# Altium PCB BU01.PcbDoc
Units mm, origin at the board's own origin, x right, y up, seen from the top; angles counter-clockwise.
Board outline 35.56 x 22.86 mm, 2 copper layers (Top Layer, Bottom Layer); 7 components, 21 nets, 48 pads, 3 vias.
Unrouted connection lines stored in the file: 6.
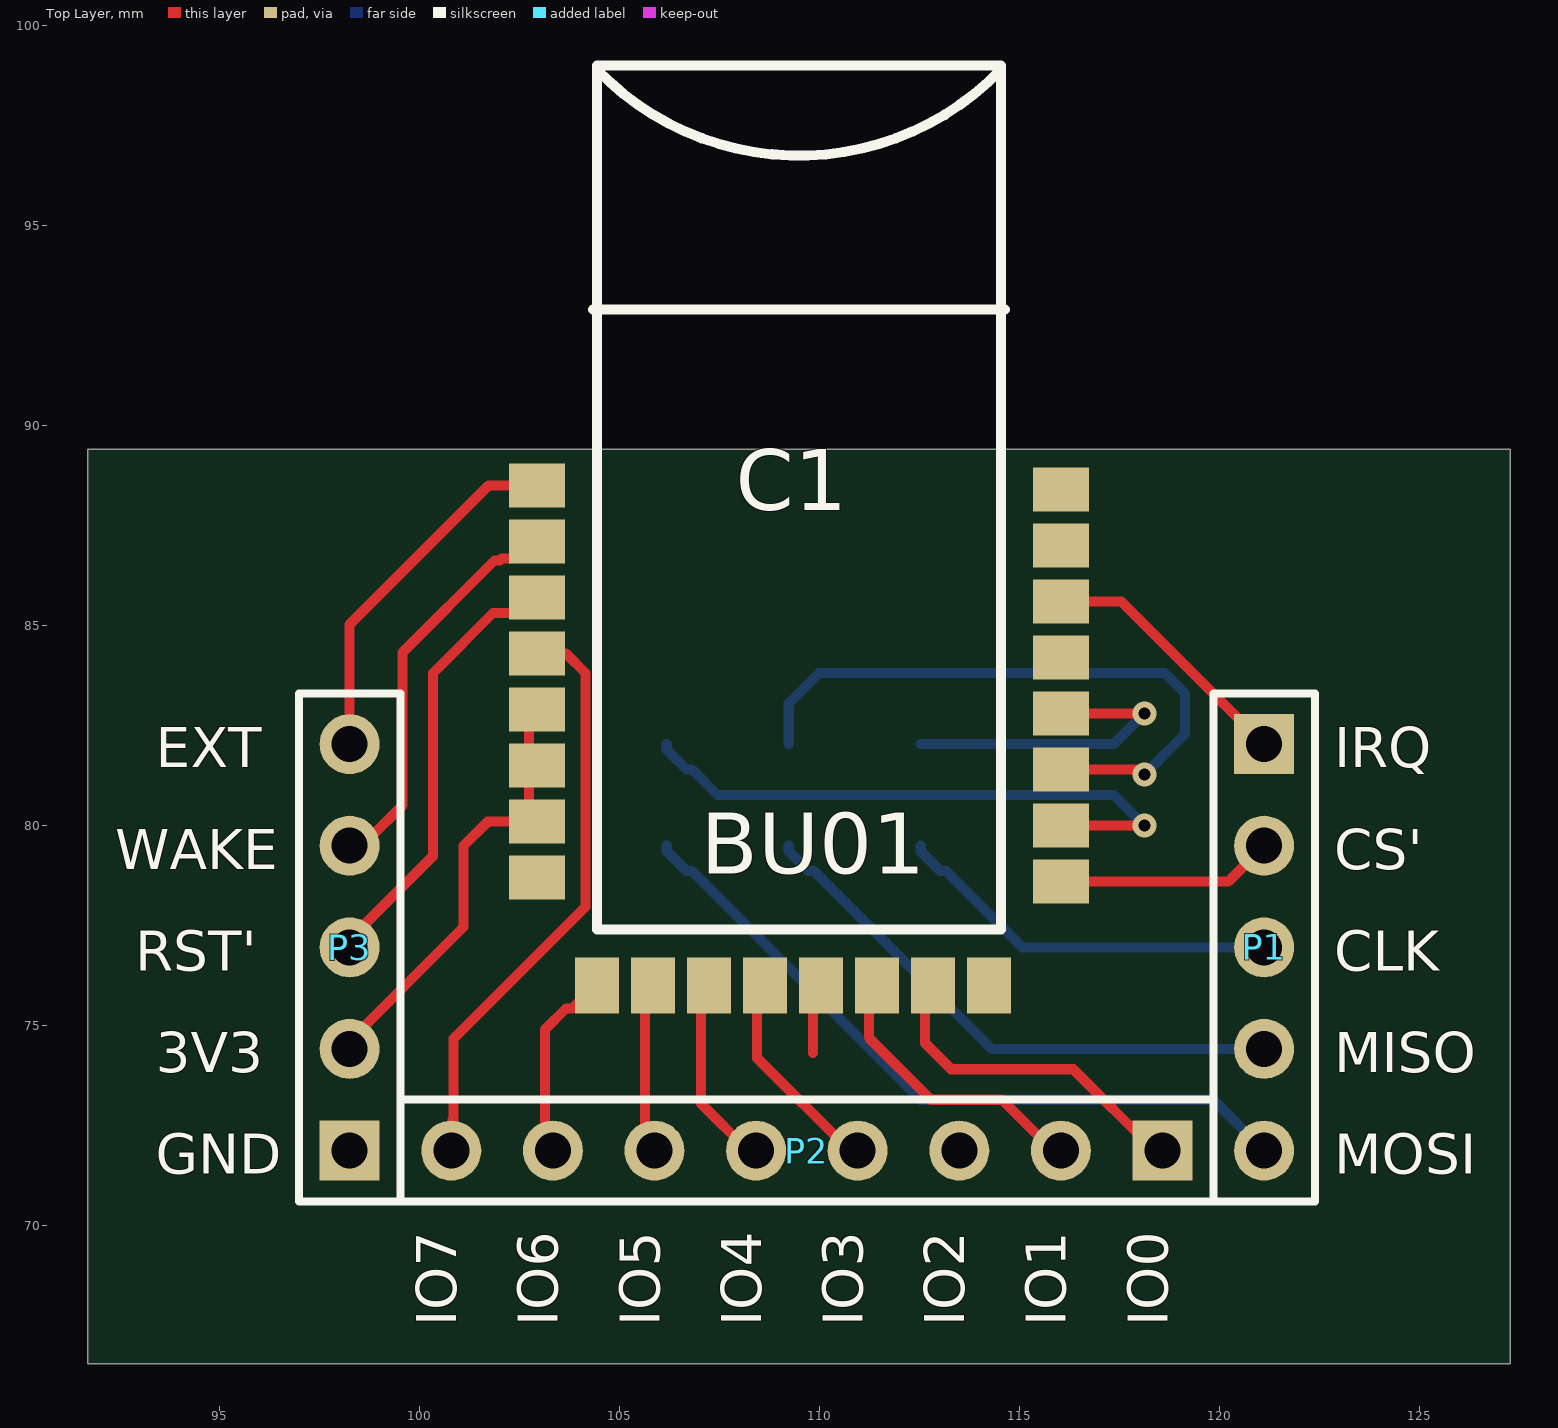
[diagram p0: Top Layer view]
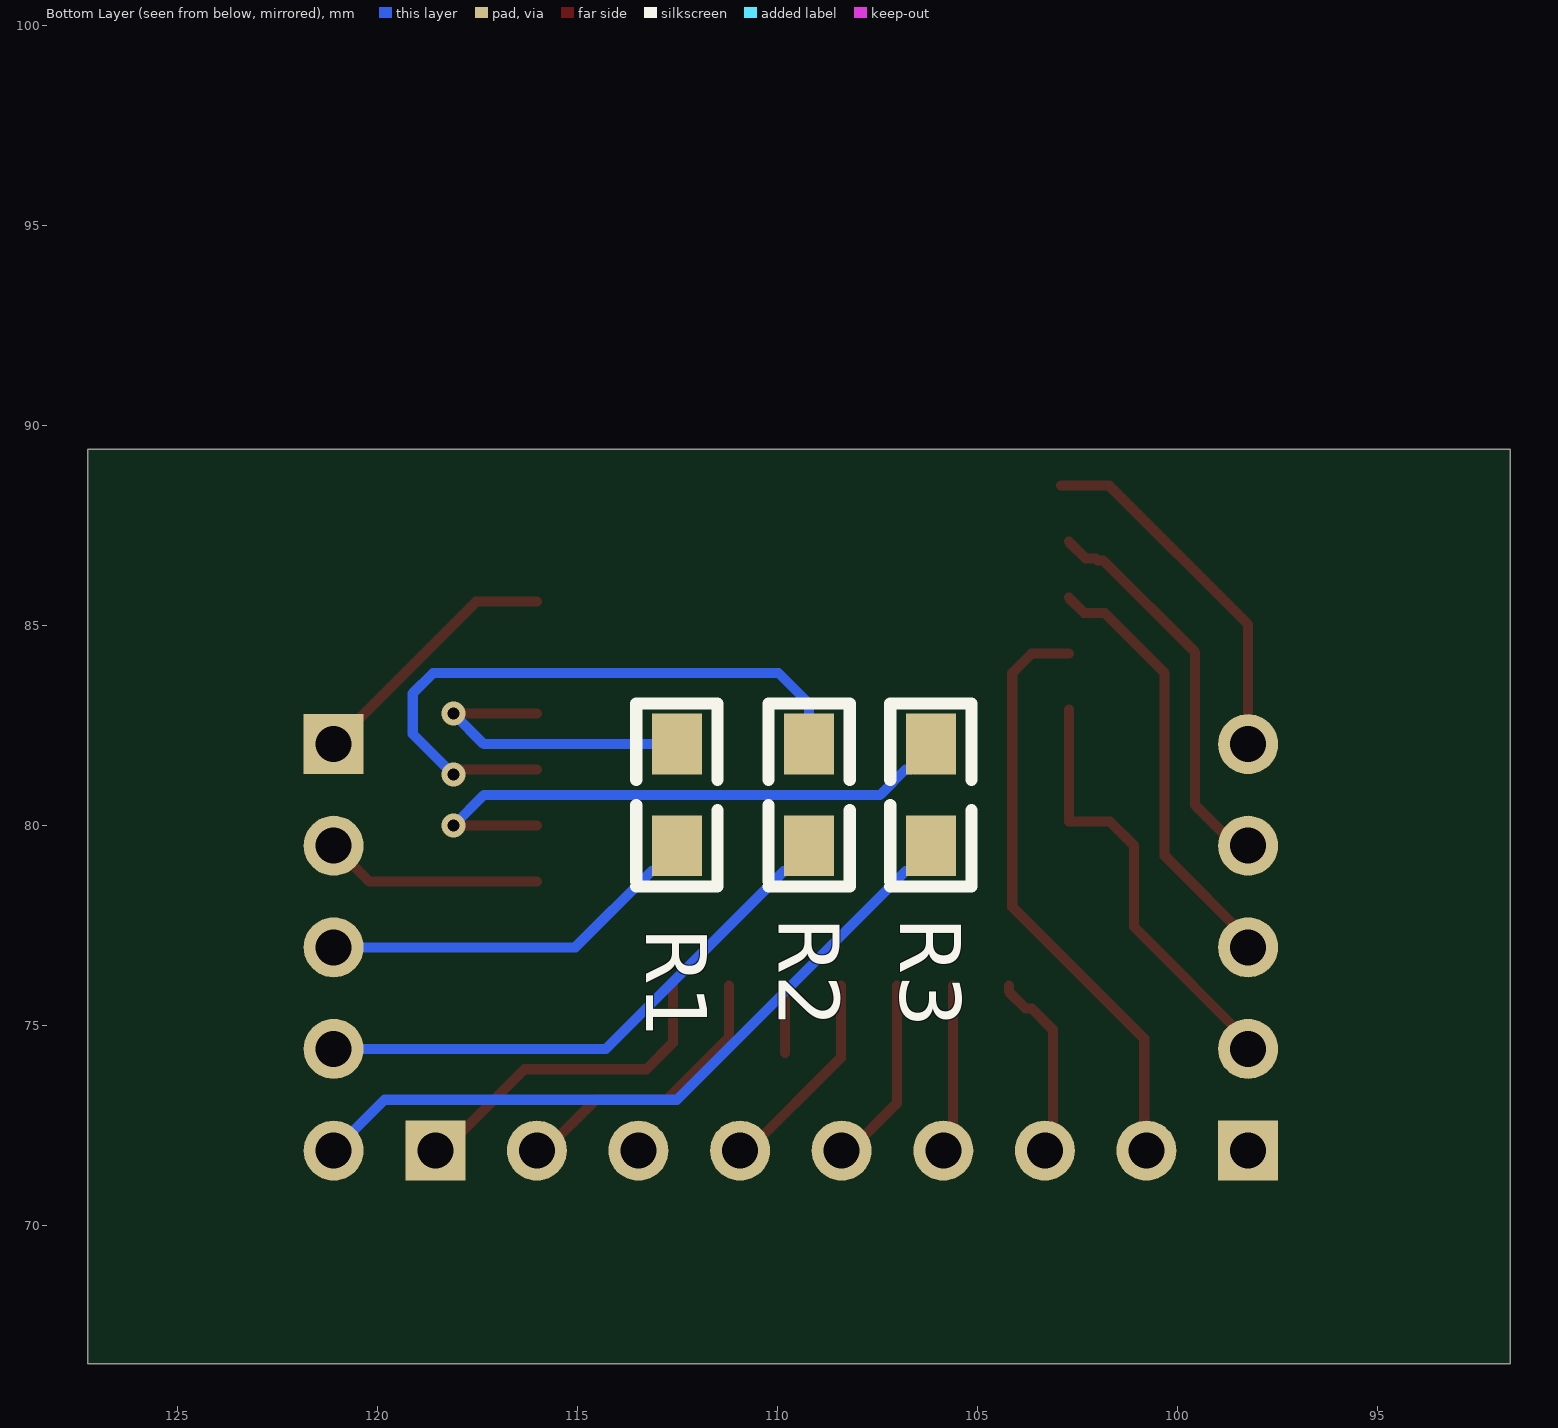
[diagram p1: Bottom Layer view, seen from below]

## Layer stack, top to bottom
Top Solder: solder mask 0.0102, Solder Resist, Dk 3.5
Top Layer: signal copper 0.0356
Dielectric 1: dielectric 0.32, FR-4, Dk 4.8
Bottom Layer: signal copper 0.0356
Bottom Solder: solder mask 0.0102, Solder Resist, Dk 3.5

## Board outline
91.694,89.408 127.254,89.408 127.254,66.548 91.694,66.548

## Design rules (kind name [scope] priority, off if disabled: settings)
Clearance [All] p1: gap=0.152 ignorepadtopadclearanceinfootprint=FALSE except(0: Arc-Hole Track-Hole SMDPad-Hole THPad-Hole Via-Hole Fill-Hole Poly-Hole Region-Hole Text-Hole)
ComponentClearance [All] p1 off: gap=0.254 collisioncheckmode=3 verticalgap=0.254 showdistances=FALSE
PolygonConnect [All] p1: connectstyle=Direct reliefconductorwidth=0.254 reliefentries=4 polygonreliefangle="90 Angle" airgapwidth=0.254
RoutingCorners [All] p1: cornerstyle=45-Degree minsetback=1.25 maxsetback=2.54
RoutingVias [All] p1: holewidth=0.6 width=0.9 viastyle="Through Hole" minholewidth=0.3 minwidth=0.6 maxholewidth=0.711 maxwidth=1.27
SilkToSilkClearance [All] p1: silktosilkclearance=0.15
SilkToSolderMaskClearance [IsPad] p1: minsilkscreentomaskgap=0.15 clearancetoexposedcopper=TRUE
SolderMaskExpansion [All] p1: expansion=0.102 istentingtop=FALSE
Width [All] p1: maxlimit=0.254 minlimit=0.254 preferedwidth=0.254
26 further rules are at their usual default settings.

## Components (designator, comment, footprint, x,y, rotation, side; value= is the part's Value field where it differs from the comment)
C1 "BU01" BU01 109.524,87.904 r0 top
P1 "Header 5" HDR1X5 121.104,82.042 r270 top
P2 "Header 8" HDR1X8 118.564,71.882 r180 top
P3 "Header 5" HDR1X5 98.244,71.882 r90 top
R1 "Res Semi" 0805 112.522,82.042 r270 bottom
R2 "Res Semi" 0805 109.22,82.042 r270 bottom
R3 "Res Semi" 0805 106.172,82.042 r270 bottom

## Footprints (in the part's own frame and the unit in brackets; to place one, negate y for a bottom-side part, rotate by r counter-clockwise, add the part's x,y. Pads: shape width x height; smd on the part's side, far side on the other; paste and mask are expansions set on the pad)
0805 [mm]
  rect 1.524x1.25 smd: 1(0,0) 2(2.54,0)
  silkscreen extent -1.02,-1.02 3.56,1.02
BU01 [mm]
  rect 1.4x1.1 smd: 1(-6.6,0.6) 2(-6.6,-0.8) 3(-6.6,-2.2) 4(-6.6,-3.6) 5(-6.6,-5) 6(-6.6,-6.4) 7(-6.6,-7.8) 8(-6.6,-9.2) 17(6.5,-9.3) 18(6.5,-7.9) 19(6.5,-6.5) 20(6.5,-5.1) 21(6.5,-3.7) 22(6.5,-2.3) 23(6.5,-0.9) 24(6.5,0.5)
  rect 1.1x1.4 smd: 9(-5.1,-11.9) 10(-3.7,-11.9) 11(-2.3,-11.9) 12(-0.9,-11.9) 13(0.5,-11.9) 14(1.9,-11.9) 15(3.3,-11.9) 16(4.7,-11.9)
  silkscreen extent -5.2,-10.5 5.1,11.1
HDR1X5 [mm] "Connector; Header; 5 Position"
  rect 1.5x1.5 hole 0.9: 1(0,0)
  round 1.5 hole 0.9: 2(2.54,0) 3(5.08,0) 4(7.62,0) 5(10.16,0)
  silkscreen extent -1.27,-1.27 11.43,1.27
HDR1X8 [mm] "Connector; Header; 8 Position"
  rect 1.5x1.5 hole 0.9: 1(0,0)
  round 1.5 hole 0.9: 2(2.54,0) 3(5.08,0) 4(7.62,0) 5(10.16,0) 6(12.7,0) 7(15.24,0) 8(17.78,0)
  silkscreen extent -1.27,-1.27 19.05,1.27

## Part data
P1 P3: "Header, 5-Pin"
P2: "Header, 8-Pin"
R1 R2 R3: "Semiconductor Resistor"

## Via types
v1: diameter 0.6, hole 0.3, Top Layer to Bottom Layer, 3 vias

## Nets (pads, with @x,y where several pads share a name; then routed paths per layer and width w, separated by ;. In a path a pad name is that pad's centre, name@x,y a point inside that pad or via, vN(x,y) a via of type N, cw(c..) or ccw(c..) an arc to the next point about the centre after c; other vN are vias at no path point)
3V3: C1.5 C1.6 C1.7 P3.2 | length 10.9
  Top Layer w0.254: P3.2@98.144,74.522 101.092,77.47 101.092,79.502 101.694,80.104 102.724,80.104 102.724,81.504 C1.5@102.724,82.904
CLK: C1.20 R1.1 | length 8
  Top Layer w0.254: C1.20 v1(118.11,82.804)
  Bottom Layer w0.254: R1.1 117.348,82.042 v1(118.11,82.804)
CS': C1.17 P1.2 | length 5.5
  Top Layer w0.254: C1.17 120.206,78.604 P1.2
EXTON: C1.1 P3.5 | length 9.1
  Top Layer w0.254: P3.5 98.244,85.036 101.712,88.504 C1.1
GND: C1.8 C1.16 C1.21 C1.23 C1.24 P3.1
IO0: C1.15 P2.1 | length 8.3
  Top Layer w0.254: C1.15@112.624,76.004 112.624,74.574 113.284,73.914 116.332,73.914 P2.1@118.364,71.882
IO1: C1.14 P2.2 | length 7.1
  Top Layer w0.254: C1.14@111.224,76.004 111.224,74.704 112.776,73.152 114.554,73.152 P2.2@115.824,71.882
IO2: C1.13 P2.3 | length 1.7
  Top Layer w0.254: 109.824,74.326 C1.13@109.824,76.004
IO3: C1.12 P2.4 | length 5.1
  Top Layer w0.254: C1.12@108.424,76.004 108.424,74.202 P2.4@110.744,71.882
IO4: C1.11 P2.5 | length 4.6
  Top Layer w0.254: C1.11@107.024,76.004 107.024,73.062 P2.5@108.204,71.882
IO5: C1.10 P2.6 | length 4.1
  Top Layer w0.254: C1.10@105.624,76.004 105.624,71.922 P2.6@105.664,71.882
IO6: C1.9 P2.7 | length 4.7
  Top Layer w0.254: P2.7@103.124,71.882 103.124,74.904 103.651,75.431 103.801,75.431 104.224,75.854 C1.9@104.224,76.004
IO7: C1.4 P2.8 | length 15
  Top Layer w0.254: P2.8@100.584,71.882 100.822,72.12 100.822,72.638 100.838,72.654 100.838,74.676 104.14,77.978 104.14,83.82 103.656,84.304 C1.4@102.724,84.304
IRQ: C1.22 P1.1 | length 6.6
  Top Layer w0.254: C1.22 117.542,85.604 P1.1
MISO: C1.19 R2.1 | length 16
  Top Layer w0.254: C1.19 117.892,81.404 118.016,81.28 v1(118.11,81.28)
  Bottom Layer w0.254: R2.1 109.22,83.058 109.982,83.82 118.618,83.82 119.126,83.312 119.126,82.296 v1(118.11,81.28)
MOSI: C1.18 R3.1 | length 14.9
  Top Layer w0.254: C1.18 118.104,80.004 v1(118.11,80.01)
  Bottom Layer w0.254: R3.1 106.172,81.905 106.67,81.407 106.807,81.407 107.442,80.772 117.348,80.772 v1(118.11,80.01)
NetP1_3: P1.3 R1.2 | length 9.7
  Bottom Layer w0.254: R1.2 112.522,79.365 113.02,78.867 113.157,78.867 115.062,76.962 P1.3
NetP1_4: P1.4 R2.2 | length 14.1
  Bottom Layer w0.254: R2.2 109.22,79.365 109.718,78.867 109.855,78.867 114.3,74.422 P1.4
NetP1_5: P1.5 R3.2 | length 18.2
  Bottom Layer w0.254: R3.2 106.172,79.365 106.67,78.867 106.807,78.867 112.522,73.152 119.834,73.152 P1.5
RST': C1.3 P3.3 | length 10.8
  Top Layer w0.254: P3.3@98.144,77.062 100.33,79.248 100.33,83.82 101.829,85.319 102.339,85.319 C1.3@102.724,85.704
WAKEUP: C1.2 P3.4 | length 10.1
  Top Layer w0.254: P3.4@98.044,79.502 98.282,79.74 98.79,79.74 99.568,80.518 99.568,84.337 101.866,86.635 102.002,86.635 102.048,86.681 102.301,86.681 C1.2@102.724,87.104

## Silkscreen, mask and mechanical layers (free items; w line width, h text height)
Top Overlay:
  text "EXT" at 93.398,81.46 h1
  text "IRQ" at 122.862,81.46 h1
  text "WAKE" at 92.382,78.92 h1
  text "CS'" at 122.862,78.92 h1
  text "RST'" at 92.89,76.38 h1
  text "CLK" at 122.862,76.38 h1
  text "3V3" at 93.398,73.84 h1
  text "MISO" at 122.862,73.84 h1
  text "GND" at 93.398,71.3 h1
  text "MOSI" at 122.862,71.3 h1
  text "IO7" at 100.912,67.49 h1 r90
  text "IO6" at 103.452,67.49 h1 r90
  text "IO5" at 105.992,67.49 h1 r90
  text "IO4" at 108.532,67.49 h1 r90
  text "IO3" at 111.072,67.49 h1 r90
  text "IO2" at 113.612,67.49 h1 r90
  text "IO1" at 116.152,67.49 h1 r90
  text "IO0" at 118.692,67.49 h1 r90
Mechanical 1:
  lines w0.254: 91.948,66.802 127,66.802 127,89.408 91.948,89.408 91.948,66.802